# Altium PCB usb-uart-nano.PcbDoc
Units mm, origin at the board's own origin, x right, y up, seen from the top; angles counter-clockwise.
Board outline 21 x 11.6 mm, 4 copper layers (Top Layer, Int1 (GND), Int2 (PWR), Bottom Layer), stack 0.91 mm thick; 15 components, 9 nets, 73 pads, 33 vias.
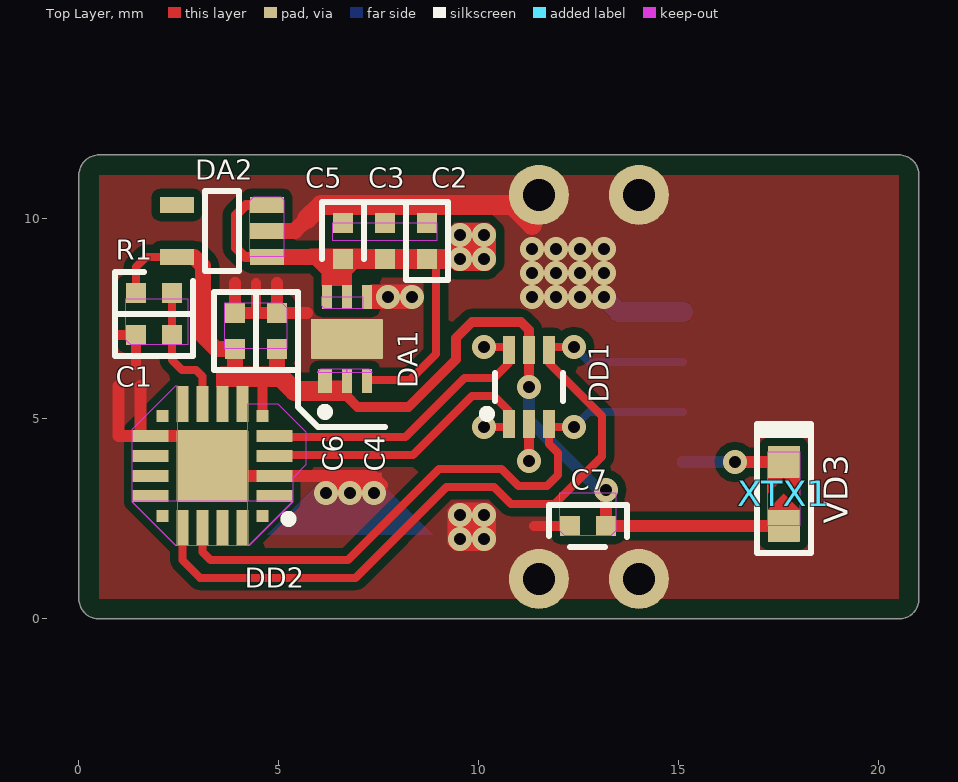
[diagram p0: Top Layer view]
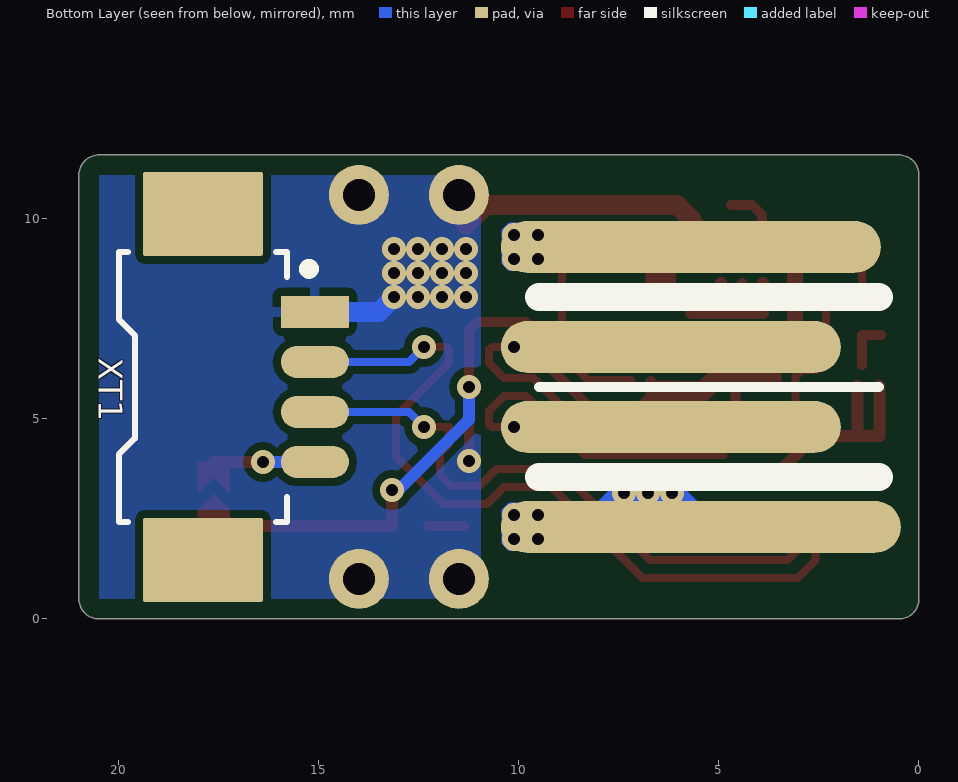
[diagram p1: Bottom Layer view, seen from below]
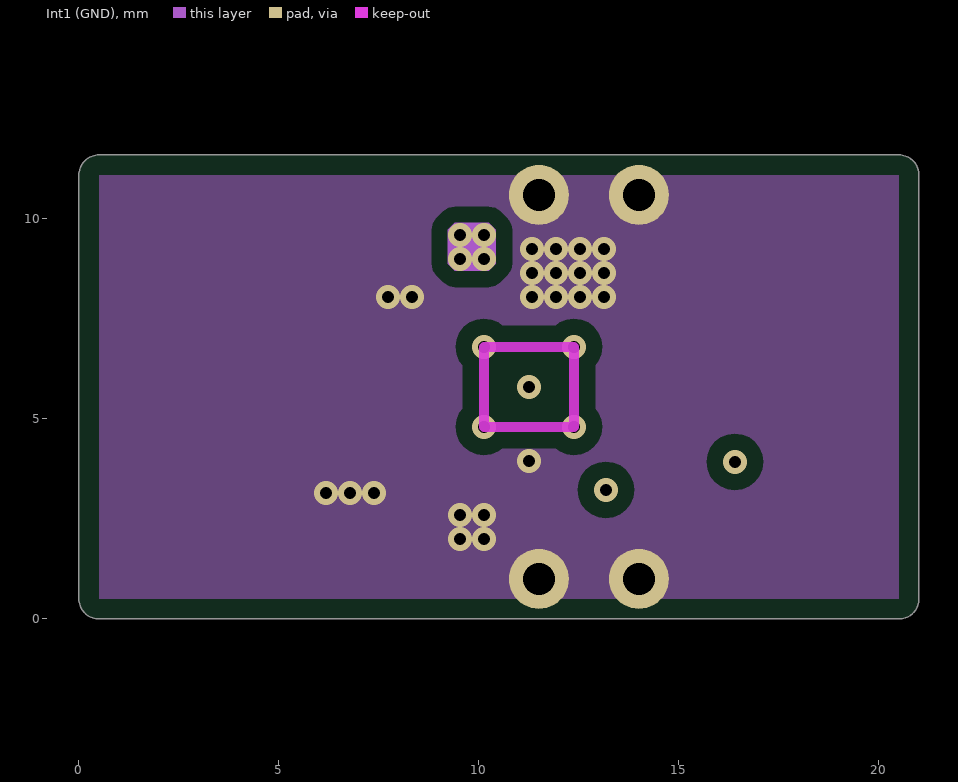
[diagram p2: Int1 (GND)]
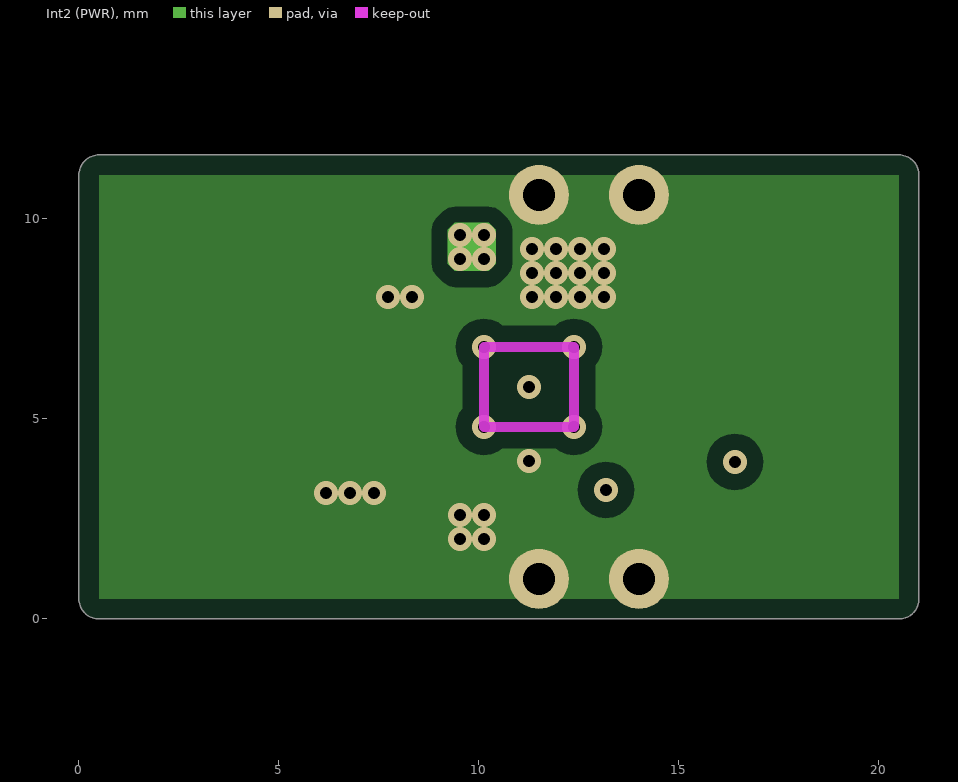
[diagram p3: Int2 (PWR)]
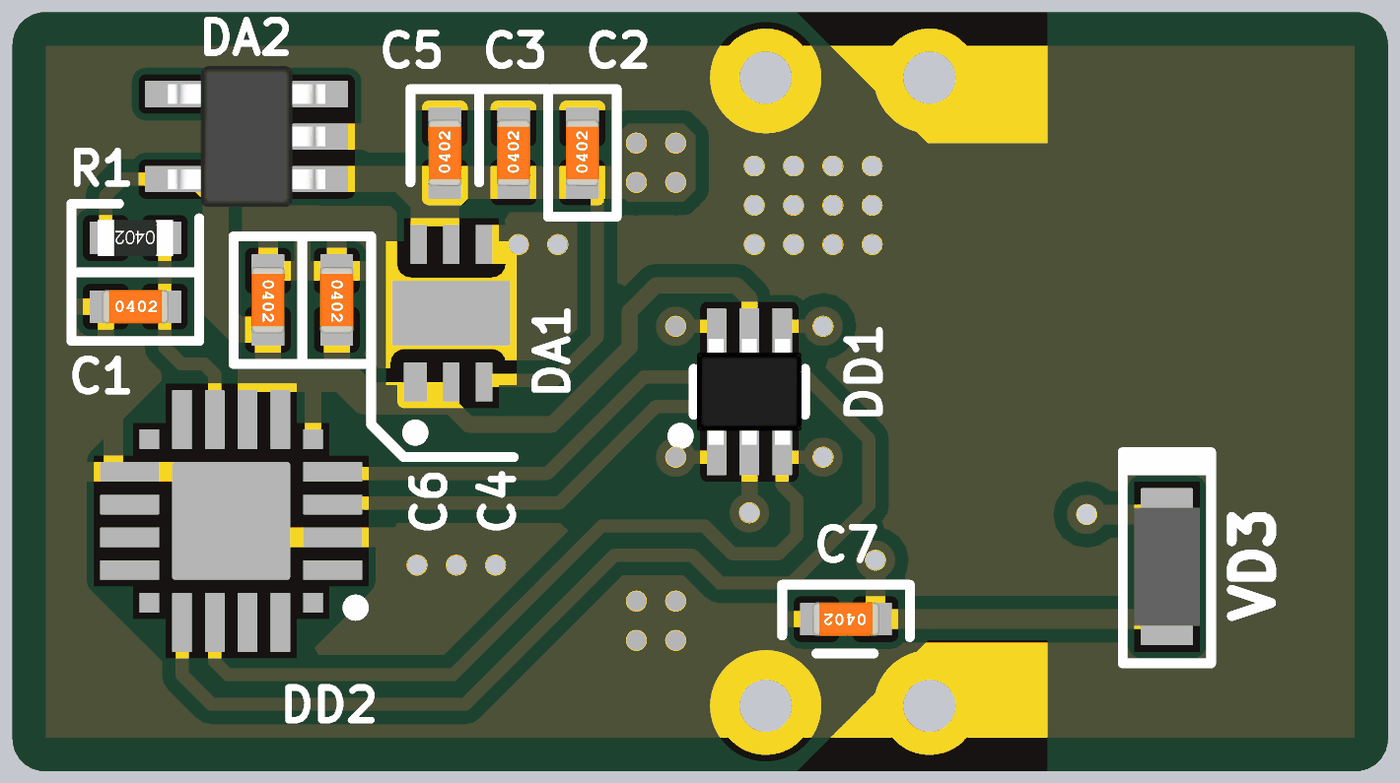
[diagram p4: 3D render of the assembled board from above, using the file's embedded part models]

## Layer stack, top to bottom
Top Solder: solder mask 0.025, SM-001, Dk 4
Top Layer: signal copper 0.035
Dielectric 1: prepreg 0.13, PP-017, Dk 4.3
Dielectric 2: prepreg 0.13, PP-017, Dk 4.3
Int1 (GND): signal copper 0.035
Dielectric 3: core 0.25, Core-039, Dk 4.8
Int2 (PWR): signal copper 0.035
Dielectric 4: prepreg 0.13, PP-017, Dk 4.3
Dielectric 5: prepreg 0.13, PP-017, Dk 4.3
Bottom Layer: signal copper 0.035
Bottom Solder: solder mask 0.025, SM-001, Dk 4

## Board outline
0.5,0 cw(c0.5,0.5) 0,0.5 0,11.1 cw(c0.5,11.1) 0.5,11.6 20.5,11.6 cw(c20.5,11.1) 21,11.1 21,0.5 cw(c20.5,0.5) 20.5,0

## Design rules (kind name [scope] priority, off if disabled: settings)
BoardOutlineClearance [All] p1: gap=0.5 ignorepadtopadclearanceinfootprint=FALSE
Clearance [All vs OnTop Or OnBottom] p1: gap=0.2 ignorepadtopadclearanceinfootprint=FALSE
Clearance Clearance_Inner [All vs OnMid] p2: gap=0.4 ignorepadtopadclearanceinfootprint=FALSE
ComponentClearance [All] p1: gap=0.15 collisioncheckmode=3 verticalgap=0.2 showdistances=FALSE
DiffPairsRouting [All] p1: maxlimit=0.254 minlimit=0.25 mostfreqgap=0.254 toplayer_maxgap=0.25 toplayer_prefgap=0.25 toplayer_minwidth=0.25 toplayer_maxwidth=0.25 toplayer_prefwidth=0.25 midlayer1_mingap=0.254 midlayer1_minwidth=0.381 midlayer1_maxwidth=0.381 midlayer1_prefwidth=0.381 midlayer2_mingap=0.254 midlayer2_minwidth=0.381 midlayer2_maxwidth=0.381 midlayer2_prefwidth=0.381 bottomlayer_maxgap=0.25 bottomlayer_prefgap=0.25 bottomlayer_minwidth=0.25 bottomlayer_maxwidth=0.25 bottomlayer_prefwidth=0.25 maxuncoupledlength=10
HoleSize [All] p1: absolutevalues=TRUE maxlimit=10 minlimit=0.025 maxpercent=80.000 minpercent=20.000
HoleToHoleClearance [All] p1: gap=0.2 allowstackedmicrovias=TRUE
MinimumSolderMaskSliver [All] p1: minsoldermaskwidth=0.15
PlaneClearance [All] p1: clearance=0.5
PlaneConnect [All] p1: planeconnectstyle=Relief reliefexpansion=0.2 reliefentries=4 reliefconductorwidth=0.2 reliefairgap=0.2
PolygonConnect Ant_vias [IsVia vs InNet('GND')] p1: connectstyle=Direct reliefconductorwidth=0.2 reliefentries=4 polygonreliefangle="90 Angle" airgapwidth=0.2
PolygonConnect [All] p2: connectstyle=Relief reliefconductorwidth=0.25 reliefentries=4 polygonreliefangle="90 Angle" airgapwidth=0.2
RoutingCorners [All] p1: cornerstyle=45-Degree minsetback=2.5 maxsetback=2.5
RoutingVias [All] p1: holewidth=0.8 width=1.25 viastyle="Through Hole" minholewidth=0.3 minwidth=0.5 maxholewidth=4.5 maxwidth=5
SilkToSilkClearance [All] p1: silktosilkclearance=0.15
SilkToSolderMaskClearance [IsPad] p1: minsilkscreentomaskgap=0.1 clearancetoexposedcopper=TRUE
SolderMaskExpansion [All] p1: expansion=0.1 istentingtop=FALSE
Width [All] p1: maxlimit=10 minlimit=0.2 preferedwidth=0.2
20 further rules are at their usual default settings.

## Components (designator, comment, footprint, x,y, rotation, side; value= is the part's Value field where it differs from the comment)
C1 "C0402" C0402 1.875,7.1 r0 top value="100н, 10В"
C2 "C0402" C0402 8.7,9.45 r90 top value="2.2мк, 10В"
C3 "C0402" C0402 7.65,9.45 r90 top value="2.2мк, 10В" (schematic designator C5)
C4 "C0402" C0402 4.95,7.2 r270 top value="2.2мк, 10В" (schematic designator C6)
C5 "C0402" C0402 6.6,9.45 r90 top value="100н, 10В" (schematic designator C7)
C6 "C0402" C0402 3.9,7.2 r270 top value="100н, 10В" (schematic designator C8)
C7 "C0402" C0402 12.725,2.325 r180 top value="100н, 10В" (schematic designator C9)
DA1 "XC6220B331ER-G" LDO_DFN-6(1.8x2) 6.7,7 r90 top
DA2 "TLV70033" SC-70-5N 3.575,9.7 r180 top
DD1 "SP3004" ESD_SOT563 11.25,5.8 r90 top
DD2 "CP2102N-A02-GQFN20R" I_QFN-20_3x3 3.339,3.825 r180 top
R1 "R0402" R0402 1.875,8.15 r180 top value=10к
VD3 "SD0603S040S0R2" 0603_DIOD 17.625,3.125 r270 top
XT1 "53261-04-71" 53261-04-71 17.4,5.8 r270 bottom locked
XTX1 "Solder bridge 0603" "Solder Bridge 0603" 17.625,3.125 r90 top

## Footprints (in the part's own frame and the unit in brackets; to place one, negate y for a bottom-side part, rotate by r counter-clockwise, add the part's x,y. Pads: shape width x height; smd on the part's side, far side on the other; paste and mask are expansions set on the pad)
0603_DIOD [mm]
  rrect5% 0.8x0.8 smd: 1(-0.8,0) 2(0.8,0)
  silkscreen extent -1.6,-0.67 1.48,0.67, body extent -0.9,-0.5 0.9,0.5, height 0.85
53261-04-71 [mm]
  rrect5% 2.1x3 smd: 0(-4.325,-0.5) 0(4.325,-0.5)
  rrect5% 0.8x1.7 smd: 1(-1.875,2.3)
  rrect100% 0.8x1.7 smd: 2(-0.625,2.3) 3(0.625,2.3) 4(1.875,2.3)
  silkscreen extent -3.37,-2.6 3.37,2.27, body extent -5.07,-2.6 5.07,2.6, height 3.4
C0402 [mm]
  rrect5% 0.5x0.5 smd mask+0.1: 1(-0.45,0) 2(0.45,0)
  silkscreen extent -0.97,-0.53 0.97,0.52, body extent -0.51,-0.25 0.51,0.25, height 0.51
ESD_SOT563 [mm]
  rrect5% 0.7x0.3 smd: 1(-0.925,0.5) 2(-0.925,0) 3(-0.925,-0.5) 4(0.925,-0.5) 5(0.925,0) 6(0.925,0.5)
  silkscreen extent -0.77,-0.85 0.35,1.15, body extent -0.81,-0.8 0.81,0.8, height 0.58
I_QFN-20_3x3 [mm]
  rrect5% 1.8x1.8 smd mask+0.1: 0(0,0)
  rrect5% 0.3x0.3 smd mask+0.1: 1(-1.25,1.25) 6(-1.25,-1.25) 11(1.25,-1.25) 16(1.25,1.25)
  rrect5% 0.9x0.3 smd mask+0.1: 2(-1.55,0.75) 3(-1.55,0.25) 4(-1.55,-0.25) 5(-1.55,-0.75) 12(1.55,-0.75) 13(1.55,-0.25) 14(1.55,0.25) 15(1.55,0.75)
  rrect5% 0.3x0.9 smd mask+0.1: 7(-0.75,-1.55) 8(-0.25,-1.55) 9(0.25,-1.55) 10(0.75,-1.55) 17(0.75,1.55) 18(0.25,1.55) 19(-0.25,1.55) 20(-0.75,1.55)
  silkscreen extent -2,1.23 -1.8,1.42, body extent -1.5,-1.5 1.5,1.5, height 0.8
LDO_DFN-6(1.8x2) [mm]
  rrect5% 1x1.8 smd mask+0.1: 0(0,0)
  rrect5% 0.6x0.35 smd mask+0.1: 1(-1.05,0.55)
  rrect5% 0.6x0.25 smd mask+0.1: 2(-1.05,0) 3(-1.05,-0.5) 4(1.05,-0.5) 5(1.05,0) 6(1.05,0.5)
  silkscreen extent -1.92,0.45 -1.73,0.65, body extent -1,-0.9 1,0.9, height 0.6
R0402 [mm]
  rrect5% 0.5x0.5 smd mask+0.1: 1(-0.45,0) 2(0.45,0)
  silkscreen extent -0.97,-0.53 0.97,0.53, body extent -0.57,-0.27 0.58,0.28, height 0.41
SC-70-5N [mm] "SC-70-5 (SOT-353), 5-Leads, Body 2,00x2,10mm, Pitch 0,65mm, IPC Medium Density"
  rrect5% 0.85x0.4 smd mask+0.1: 1(-1.125,0.65) 2(-1.125,0) 3(-1.125,-0.65) 4(1.125,-0.65) 5(1.125,0.65)
  silkscreen extent -0.43,-1 0.43,1, body extent -1.2,-1.07 1.2,1.07, height 1.1
"Solder Bridge 0603" [mm]
  rrect5% 0.8x0.8 smd: 1(-0.8,0) 2(0.8,0)
  Top Layer region: -0.4,0.4 0,0 -0.4,-0.4 -0.8,-0.4 -0.8,0.4
  Top Layer region: 0,-0.4 0.4,0 0,0.4 0.8,0.4 0.8,-0.4

## Part data
C1 C2 C3 C4 C5 C6 C7: "Конденсатор керамический", ComponentLink1Description=Datasheet, ComponentLink2Description=Shop, FP_TS=0402, Name="Конденсатор керамический 0402"
DA1: "Стабилизатор напряжения 3.3", JLCPART=C3013657, ComponentLink1Description=Datasheet, ComponentLink1URL=https://www.lcsc.com/datasheet/lcsc_datasheet_2410121540_Torex-Semicon-XC6220B331ER-G_C3013657.pdf, ComponentLink2Description=Shop, ComponentLink2URL=https://www.lcsc.com/product-detail/Voltage-Regulators-Linear-Low-Drop-Out-LDO-Regulators_Torex-Semicon-XC6220B331ER-G_C3013657.html?s_z=n_LP38692SD-3.3, Name=XC6220B331ER-G, Мanufacturer="Torex Semicon"
DA2: "Стабилизатор напряжения 3.3В, с управлением", ComponentLink1Description=Datasheet, ComponentLink1URL=http://www.ti.com/lit/ds/symlink/tlv700-q1.pdf, ComponentLink2Description=Shop, ComponentLink2URL=https://www.digikey.com/product-detail/en/texas-instruments/TLV70033DDCR/296-27937-1-ND/2440840, Name="Стабилизатор TLV70033", Мanufacturer="Texas Instruments"
DD1: "Защитные диоды 4 канала+питание", JLCPART=C207280, ComponentLink1Description=Datasheet, ComponentLink2Description=Shop, Name=SP3004
DD2: "USB/UART мост", JLCPART=C969913, Manufacturer="Silicon Labs", ComponentLink1Description=Datasheet, ComponentLink1URL=https://www.silabs.com/documents/public/data-sheets/cp2102n-datasheet.pdf, ComponentLink2Description=Shop, ComponentLink2URL=https://www.lcsc.com/product-detail/USB-Converters_SKYWORKS-SILICON-LABS-CP2102N-A02-GQFN20R_C969913.html?s_z=n_CP2102N-A01-GQFN2, Name=CP2102N-A02-GQFN20R
R1: "Чип-Резистор", ComponentLink1Description=Datasheet, ComponentLink2Description=Shop, Footprint_label=0402, Name="Чип-резистор 0402"
VD3: "Диод Шоттки 0.2А, 40В", JLCPART=C3758192, ComponentLink1Description=Datasheet, ComponentLink1URL=http://datasheets.avx.com/schottky.pdf, ComponentLink2Description=Shop, ComponentLink2URL=https://www.digikey.com/product-detail/en/avx-corporation/SD0603S040S0R2/478-7798-1-ND/3749483, Name=SD0603S040S0R2, Мanufacturer=AVX
XT1: "Вилка на плату угловая", JLCPART=C240847, ComponentLink1Description=Datasheet, ComponentLink1URL=https://www.molex.com/content/dam/molex/molex-dot-com/products/automated/en-us/salesdrawingpdf/532/53261/532610671_sd.pdf?inline, ComponentLink2Description=Shop, ComponentLink2URL=https://www.lcsc.com/product-detail/Wire-To-Board-Connector_MOLEX-532610471_C696092.html, Name=53261-04-71, Мanufacturer=Molex
XTX1: "Паяемая перемычка 0603", ComponentLink1Description=Datasheet, ComponentLink2Description=Shop, Name="Solder bridge 0603"

## Free pads (board coordinates)
  oval 10x1.3 smd far side: 4(5.45,2.3)
  oval 9.5x1.3 smd far side: 4(5.7,9.3)
  oval 8.5x1.3 smd far side: 4(6.2,4.8) 4(6.2,6.8)
  round 1.5 hole 0.8: 6(11.5,1) 6(11.5,10.6) 6(14,1) 6(14,10.6)

## Via types
v1: diameter 0.6, hole 0.3, Top Layer to Bottom Layer, tented both sides, 33 vias

## Nets (pads, with @x,y where several pads share a name; then routed paths per layer and width w, separated by ;. In a path a pad name is that pad's centre, name@x,y a point inside that pad or via, vN(x,y) a via of type N, cw(c..) or ccw(c..) an arc to the next point about the centre after c; other vN are vias at no path point)
3.3V1: C4.2 C6.2 C7.1 DA1.1 DA1.2 DA2.5 DD1.5 DD2.6 DD2.7 DD2.8 R1.2 VD3.2 XTX1.1 | length 24.9
  Top Layer w0.2: R1.2 1.425,8.8 1.675,9.05 DA2.5@2.375,9.05
  Top Layer w0.25: DD2.6 4.589,5.925 ; DA1.2 6.7,5.565 6.965,5.3 8.236,5.3 9.425,6.489 9.425,7.025 9.825,7.425 11.05,7.425 11.25,7.225 DD1.5 v1(11.25,5.8)
  Top Layer w0.3: v1(13.175,3.225) C7.1 VD3.2
  Top Layer w0.4: DA2.5 2.875,9.05 3.1,8.825 3.1,7.075 3.425,6.75 C6.2 3.9,6.1 ; 4.95,6.1 C4.2
  Top Layer w0.5: 5.039,6.05 5.389,5.7 5.975,5.7
  Bottom Layer w0.3: v1(11.25,5.8) 11.25,4.975 13,3.225 v1(13.175,3.225)
3.3V2: VD3.1 XT1.4 XTX1.2 | length 2.5
  Top Layer w0.3: v1(16.4,3.925) VD3.1
  Bottom Layer w0.3: XT1.4 v1(16.4,3.925)
5V1: C2.1 C3.1 C5.1 DA1.3 DA1.5 DA1.6 DA2.1 DA2.3 pad.4@5.7,9.3 | length 11.8
  Top Layer w0.2: DA1.3@7.2,5.975 8.275,5.975 8.925,6.625 C2.1@8.925,9
  Top Layer w0.25: DA2.1 4.15,9.05 3.925,9.275 3.925,10.1 4.175,10.35 DA2.3
  Top Layer w0.4: DA2.1 C5.1@6.6,9.05
  Top Layer w0.5: C5.1 C3.1 C2.1 8.925,9 v1(9.525,9)
  other v1: 10.125,9 9.525,9.6 10.125,9.6
BUS_DM: DD1.6 DD2.5 pad.4@6.2,6.8 | length 7.6
  Top Layer w0.2: DD2.5@4.889,4.55 8.164,4.55 9.639,6.025 10.375,6.025 10.75,6.4 DD1.6 10.675,6.8 v1(10.125,6.8)
BUS_DP: DD1.1 DD2.4 pad.4@6.2,4.8 | length 7.6
  Top Layer w0.2: DD2.4@4.889,4.1 8.35,4.1 9.825,5.575 10.375,5.575 10.75,5.2 DD1.1 10.675,4.8 v1(10.125,4.8)
GND: C1.1 C2.2 C3.2 C4.1 C5.2 C6.1 C7.2 DA1.0 DA1.4 DA2.2 DD1.2 DD2.0 DD2.3 DD2.12 pad.4@5.45,2.3 pad.6 XT1.1 | length 26.3
  Top Layer w0.25: 0.95,7.1 C1.1 1.425,6.35 ; 4.425,7.65 4.425,8.4 ; v1(11.25,3.95) DD1.2 ; 11.375,2.325 C7.2
  Top Layer w0.3: 0.989,5.825 0.989,4.575 DD2.12@1.539,4.575 ; 1.539,5.825 DD2.12@1.539,4.575 ; 3.9,8.4 C6.1 4.425,7.65 C4.1 ; 4.95,8.4 C4.1 ; 5.7,7.65 C4.1 ; DA1.0@6.2,7 DA1.0 ; v1@7.575,3.35 7.35,3.575 DD2.3 3.589,3.575 DD2.0 2.589,4.575 DD2.12 DD2.12@1.539,4.575
  Top Layer w0.4: DA2.2@4.775,9.7 5.4,9.7 5.696,9.996
  Top Layer w0.5: 5.696,9.996 6.05,10.35 10.825,10.35 11.325,9.85
  Bottom Layer w0.5: v1@13.175,8 13.5,7.675 XT1.1
  other v1: 9.525,2 10.125,2 9.525,2.6 10.125,2.6 6.175,3.15 6.775,3.15 7.375,3.15 7.725,8.05 8.325,8.05 11.325,8.05 11.925,8.05 12.525,8.05 13.125,8.05 11.325,8.65 11.925,8.65 12.525,8.65 13.125,8.65 11.325,9.25 11.925,9.25 12.525,9.25 13.125,9.25
NetC1_2: C1.2 DD2.9 R1.1 | length 3.3
  Top Layer w0.2: R1.1 C1.2 2.325,6.475 2.575,6.225 2.925,6.225 3.089,6.061 DD2.9
USB_COM_RX: DD1.4 DD2.17 XT1.2 | length 19.8
  Top Layer w0.2: DD2.17 2.589,1.468 3.032,1.025 6.911,1.025 9.186,3.3 10.375,3.3 10.8,2.875 11.886,2.875 13.075,4.064 13.075,5.075 12.125,6.025 11.75,6.4 DD1.4 11.825,6.8 v1(12.375,6.8)
  Bottom Layer w0.2: v1(12.375,6.8) 12.75,6.425 XT1.2
USB_COM_TX: DD1.3 DD2.18 XT1.3 | length 15.6
  Top Layer w0.2: DD2.18 3.089,1.675 3.289,1.475 6.725,1.475 9,3.75 10.561,3.75 10.986,3.325 11.7,3.325 11.975,3.6 11.975,4.15 11.75,4.375 11.75,4.8 v1(12.375,4.8)
  Bottom Layer w0.2: v1(12.375,4.8) 12.75,5.175 XT1.3
pads on no net: DA2.4 DD2.1 DD2.2 DD2.10 DD2.11 DD2.13 DD2.14 DD2.15 DD2.16 DD2.19 DD2.20 XT1.0

## Polygon pours and split planes (outlines as drawn)
GND on Bottom Layer "GND_L04_P002" (solid, pour order 2): 21,0 21,11.6 10.95,11.6 10.95,0
GND on Int1 (GND) "GND_L02_P006" (solid, pour order 6): 21,0 21,11.6 0,11.6 0,0
GND on Int2 (PWR) "GND_L03_P008" (solid, pour order 8): 21,0 21,11.6 0,11.6 0,0
GND on Top Layer "GND_L01_P000" (solid, remove dead copper, pour order 0): 21,0 21,11.6 0,11.6 0,0

## Keep-outs
Top Layer:
  region: 13.425,3.15 13.425,2.2 13.3,2.075 12.15,2.075 12.025,2.2 12.025,3.15
  region: 2.725,8 2.725,6.85 1.3,6.85 1.175,6.975 1.175,8
  region: 7.25,6.25 7.325,6.175 7.325,6.15 6.7,6.15 6.7,6.25
  region: 6.15,7.75 6.075,7.825 6.075,8.05 7.1,8.05 7.1,7.75
  region: 5.975,6.15 5.975,6.175 6.05,6.25 6.7,6.25 6.7,6.15
  region: 4.215,5.375 4.975,5.375 5.675,4.675 5.675,3.85 5.34,3.515 5.34,2.913 4.252,1.825 4.215,1.825
  region: 5.339,2.949 5.339,2.924 4.239,1.824 2.426,1.824 1.339,2.911 1.339,2.949
  region: 2.463,1.825 2.437,1.825 1.338,2.925 1.337,4.737 2.425,5.825 2.463,5.825
  region: 18.025,2.325 17.225,2.325 17.225,4.175 18.025,4.175
  region: 4.275,10.45 4.375,10.55 5.05,10.55 5.125,10.475 5.125,9.05 4.275,9.05
  region: 6.35,9.458 6.35,9.9 8.95,9.9 8.95,9.458
  region: 3.65,6.75 3.65,7.9 5.075,7.9 5.2,7.775 5.2,6.75
Int1 (GND):
  lines w0.25: 10.125,4.8 10.125,6.8 12.375,6.8 12.375,4.8 10.125,4.8
Int2 (PWR):
  lines w0.25: 10.125,4.8 12.375,4.8 12.375,6.8 10.125,6.8 10.125,4.8

## Other copper
Top Layer:
  region net 3.3V1: 3.439,6.2 3.539,6.3 5.039,6.3 5.039,5.8 3.439,5.8
  region net 5V1: 6.825,8.975 6.55,9.25 5.775,9.25 5.775,8.925 6.075,8.625 6.075,8.325 6.825,8.325
  region net 5V1: 6.075,8.975 6.35,9.25 7.125,9.25 7.125,8.925 6.825,8.625 6.825,8.325 6.075,8.325
  region net 5V1: 9.225,9.725 9.4,9.9 10.25,9.9 10.425,9.725 10.425,8.875 10.25,8.7 9.4,8.7 9.225,8.875
  region net GND: 7.575,3.65 7.575,3.05 6.375,3.05 6.375,3.65
  region net GND: 9.225,2.725 9.4,2.9 10.25,2.9 10.425,2.725 10.425,1.875 10.25,1.7 9.4,1.7 9.225,1.875
  region net 3.3V1: 6.825,5.45 5.975,5.45 5.975,5.95 6.825,5.95
  region net GND: 8.325,8.35 8.325,7.75 7.3,7.75 7.3,8.35
Int1 (GND):
  region net 5V1: 9.225,9.725 9.4,9.9 10.25,9.9 10.425,9.725 10.425,8.875 10.25,8.7 9.4,8.7 9.225,8.875
Int2 (PWR):
  region net 5V1: 9.225,9.725 9.4,9.9 10.25,9.9 10.425,9.725 10.425,8.875 10.25,8.7 9.4,8.7 9.225,8.875
Bottom Layer:
  region net GND: 7.425,8.175 7.6,8.35 8.45,8.35 8.625,8.175 8.625,7.925 8.45,7.75 7.6,7.75 7.425,7.925
  region net GND: 7.5,3.45 8.85,2.1 4.7,2.1 6.05,3.45
  region net 5V1: 9.225,9.725 9.4,9.9 10.25,9.9 10.425,9.725 10.425,8.875 10.25,8.7 9.4,8.7 9.225,8.875
  region net GND: 9.225,2.725 9.4,2.9 10.25,2.9 10.425,2.725 10.425,1.875 10.25,1.7 9.4,1.7 9.225,1.875

## Silkscreen, mask and mechanical layers (free items; w line width, h text height)
Top Overlay:
  lines w0.15: 5.475,6.225 5.475,5.3 5.975,4.8 7.65,4.8 ; 16.95,4.475 16.95,4.875 18.3,4.875 18.3,4.475
Bottom Overlay:
  lines w0.25: 1,5.8 9.5,5.8
  lines w0.7: 1,3.55 9.5,3.55 ; 1,8.05 9.5,8.05
Top Solder:
  region: 5.225,10.35 5.225,9.05 4.175,9.05 4.175,10.35
  region: 10.75,5.325 11.75,5.325 11.75,4.425 10.75,4.425
  region: 10.75,7.175 11.75,7.175 11.75,6.275 10.75,6.275
  region: 11.975,11.6 13.975,9.6 15.8,9.6 15.8,11.6
  region: 11.975,0 13.975,2 15.8,2 15.8,0
Bottom Solder:
  region: 11.975,0 13.975,2 15.8,2 15.8,0
  region: 11.975,11.6 13.975,9.6 15.8,9.6 15.8,11.6
Mechanical 1:
  lines w0.25: 4.464,1.7 5.014,1.7 ; 4.489,1.25 5.039,1.25 ; 5.675,4.325 6.225,4.325 ; 9.15,6.8 9.15,7.35 ; 12.1,5.8 12.65,5.8
Top Assembly:
  lines w0.15: 0,8.6 10.85,8.6 ; 0.989,0.4 0.989,5.2 ; 1,1 10.5,1 ; 1,5.8 1,10.6 10.5,10.6 ; 4.75,5.8 9.5,5.8 ; 9.5,2 10.5,2 10.5,1 ; 9.5,9.6 10.5,9.6 10.5,10.6 ; 9.5,10.6 9.5,11.6 ; 10.5,0 10.5,1 ; 10.5,11.6 10.5,10.6 ; 13.5,10.6 13.5,11.6 ; 14,0 14,11.6 ; 16,0 16,11.6 ; 10.5,1 20,1 20,5.8 20,10.6 10.5,10.6
Mechanical 3:
  the board outline again, w0.15